# Altium PCB Pulp FMC Sensor Board_8X64Mbits_HyperRam.PcbDoc (part 1 of 3)
Units mm, origin at the board's own origin, x right, y up, seen from the top; angles counter-clockwise.
Board outline 72.9 x 68.96 mm, 4 copper layers (Top Layer, GND, PWR, Bottom Layer), stack 1.56 mm thick; 43 components, 37 nets, 422 pads, 283 vias.
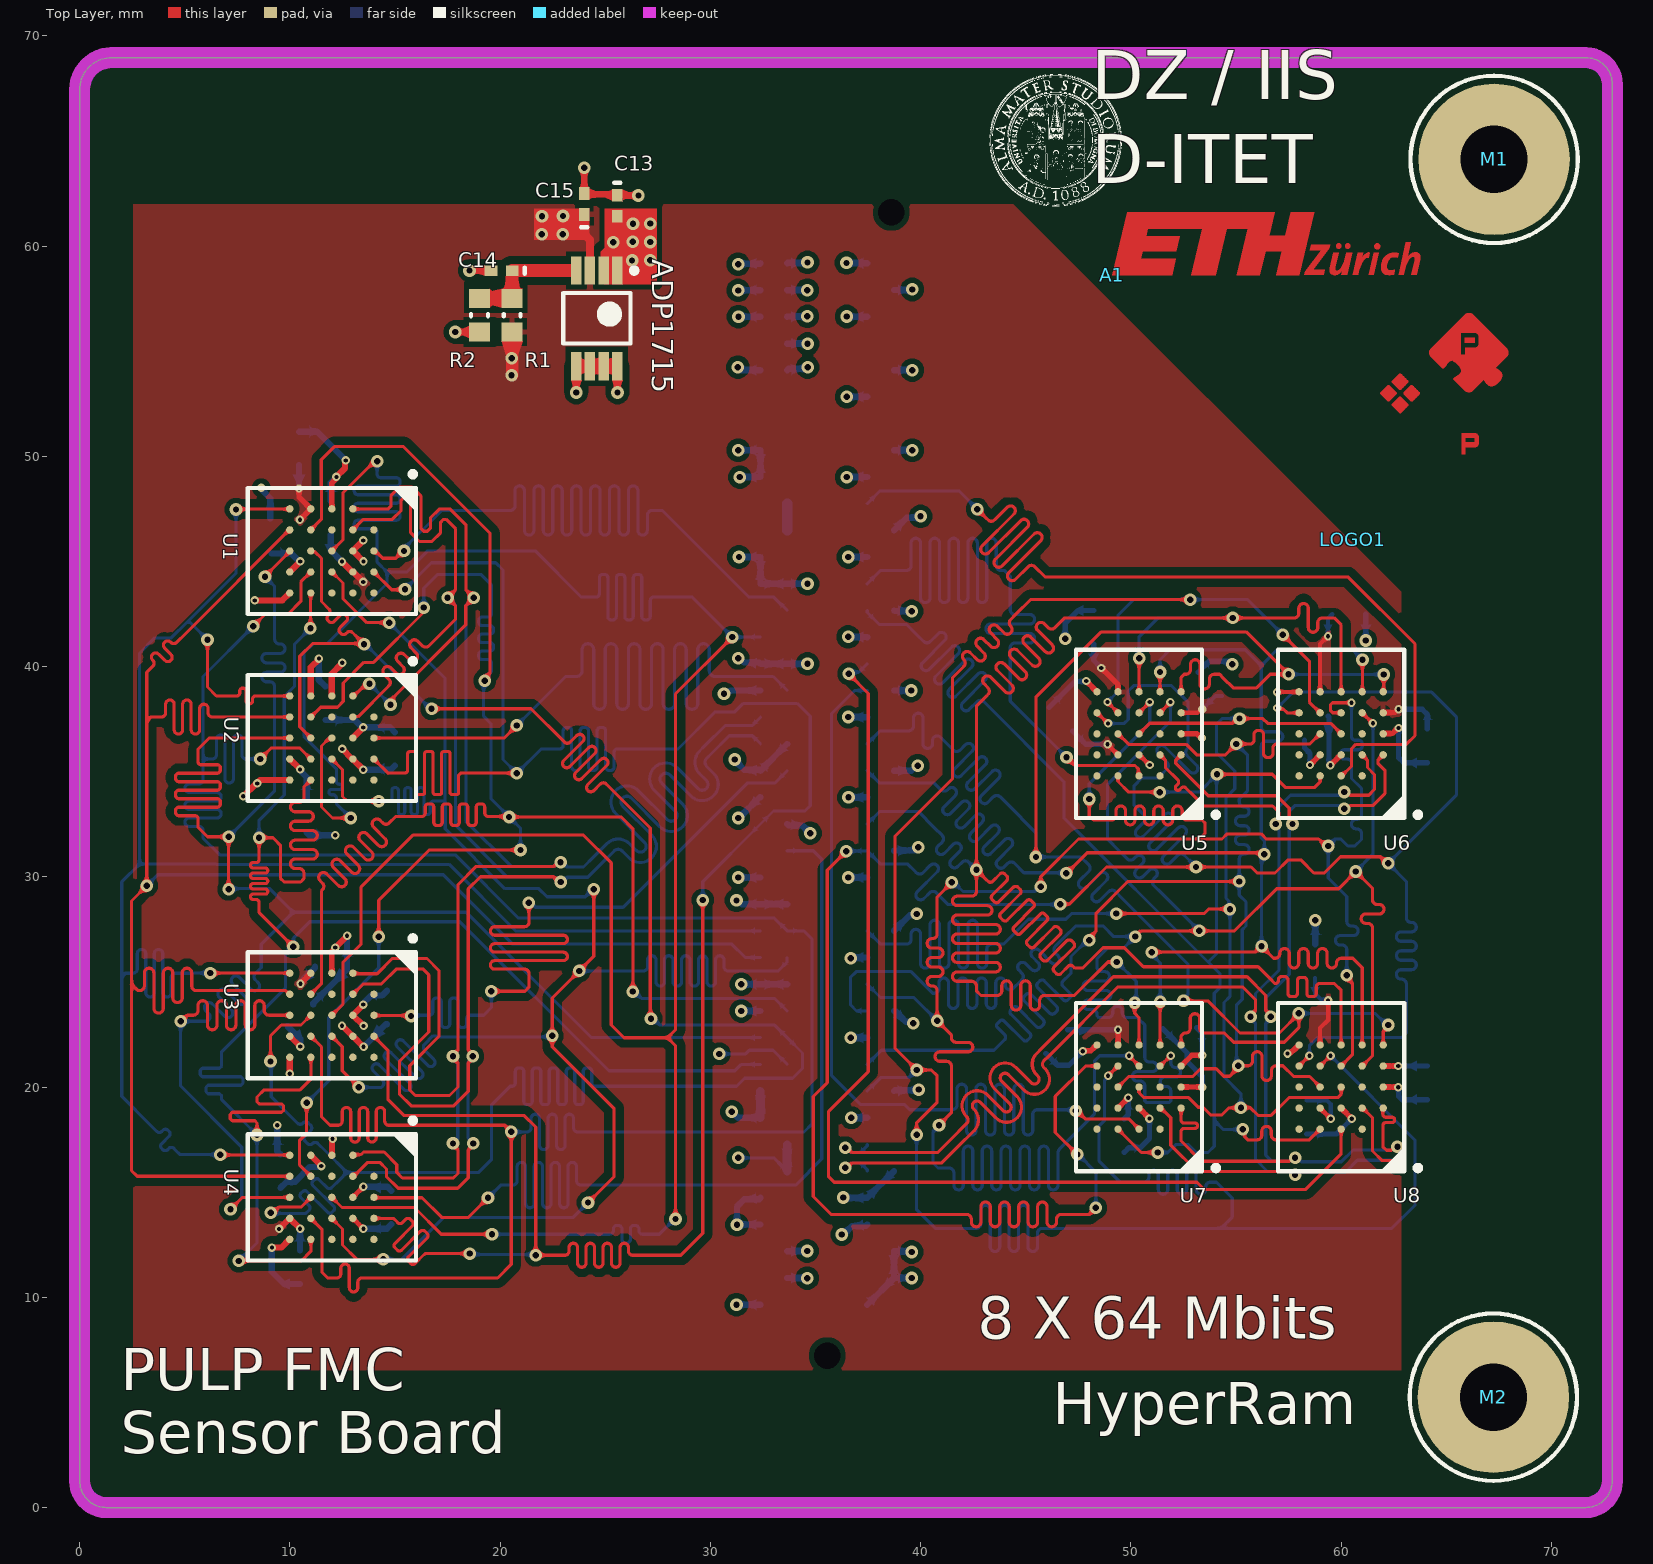
[diagram p0: Top Layer view]
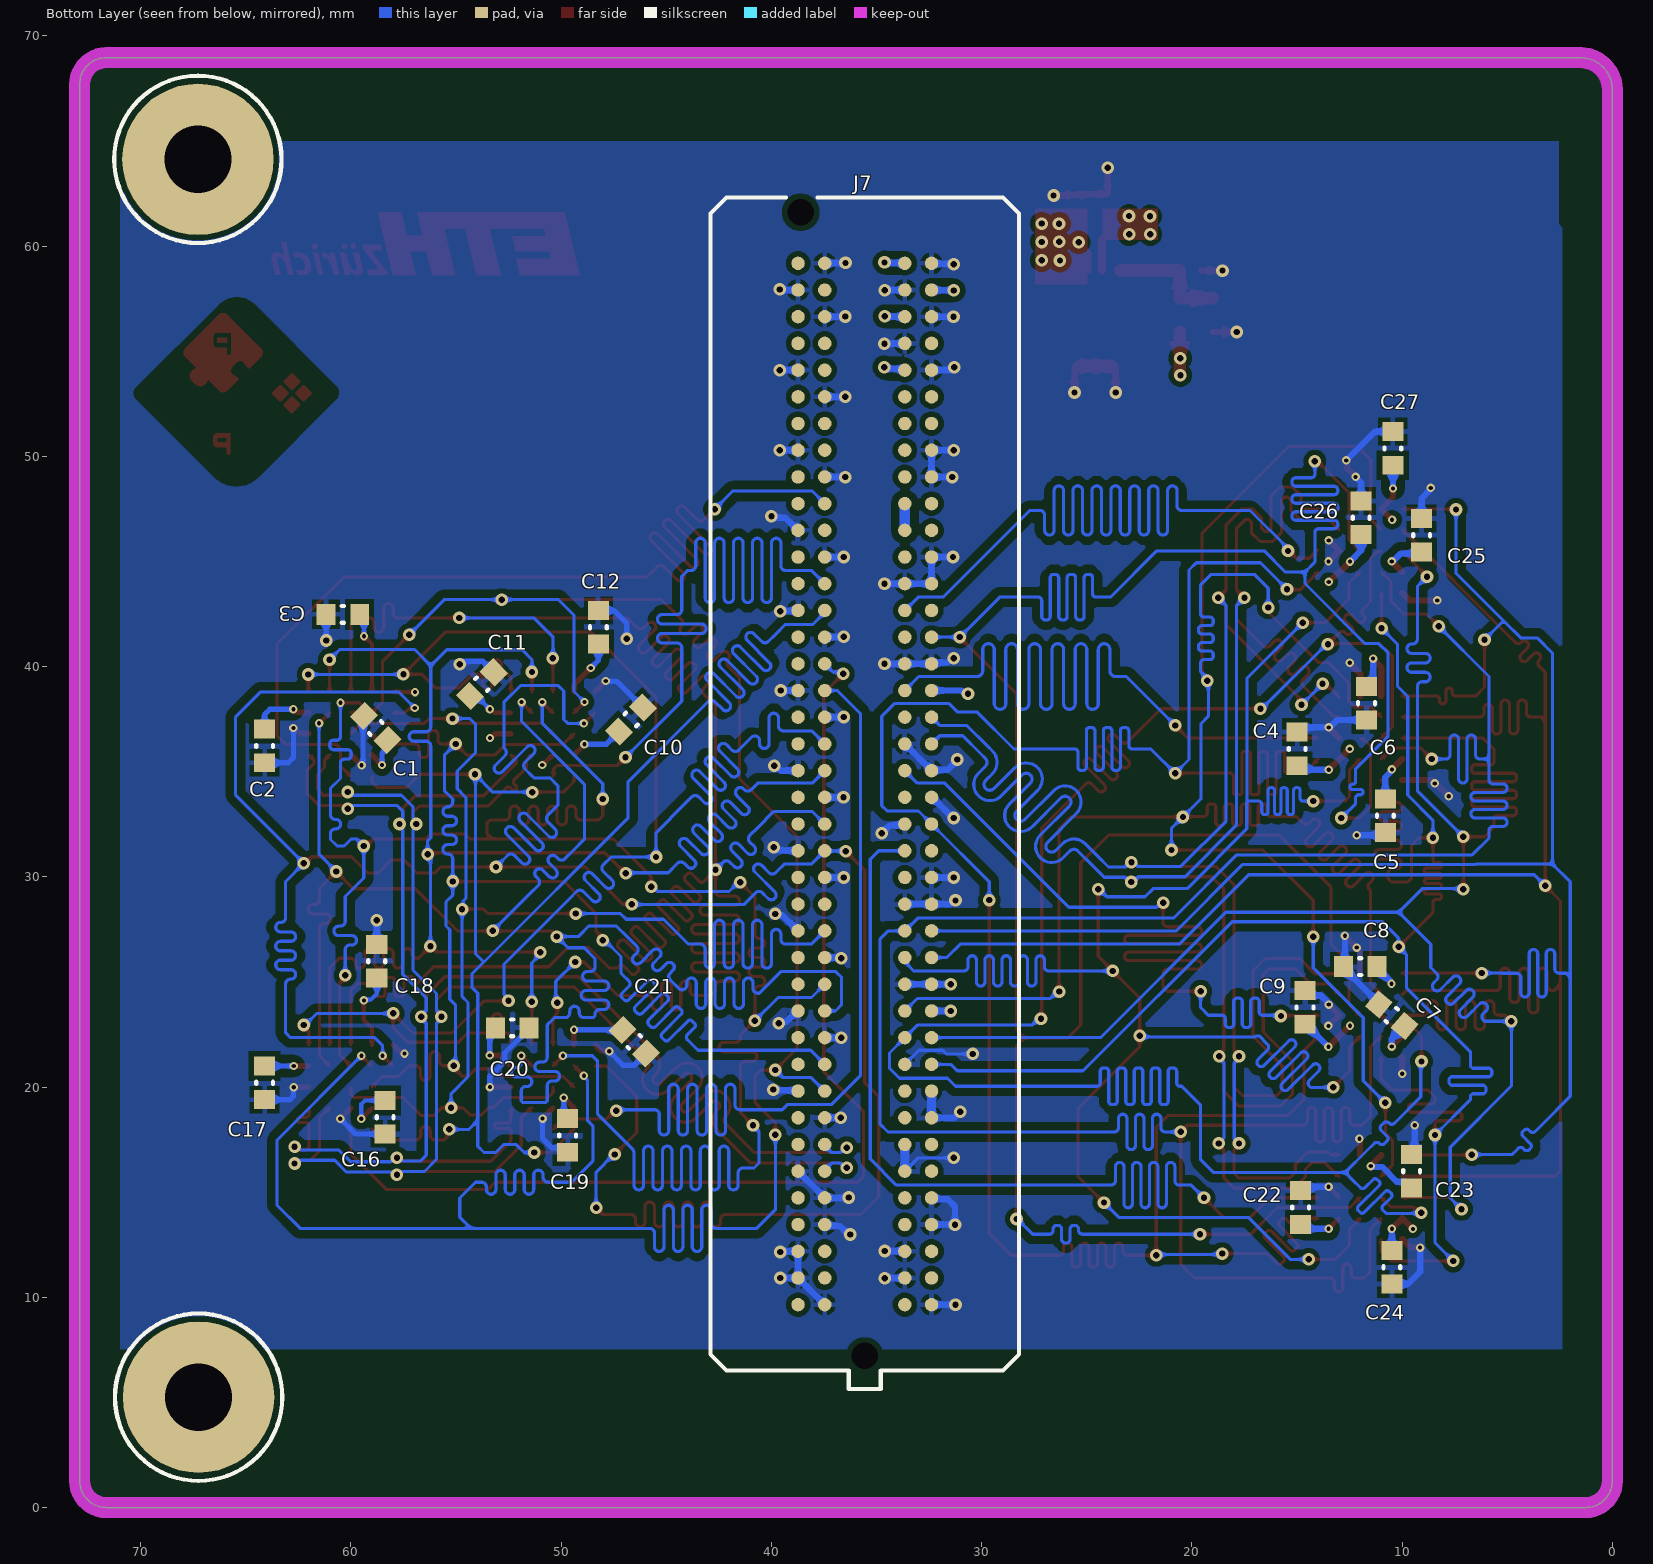
[diagram p1: Bottom Layer view, seen from below]
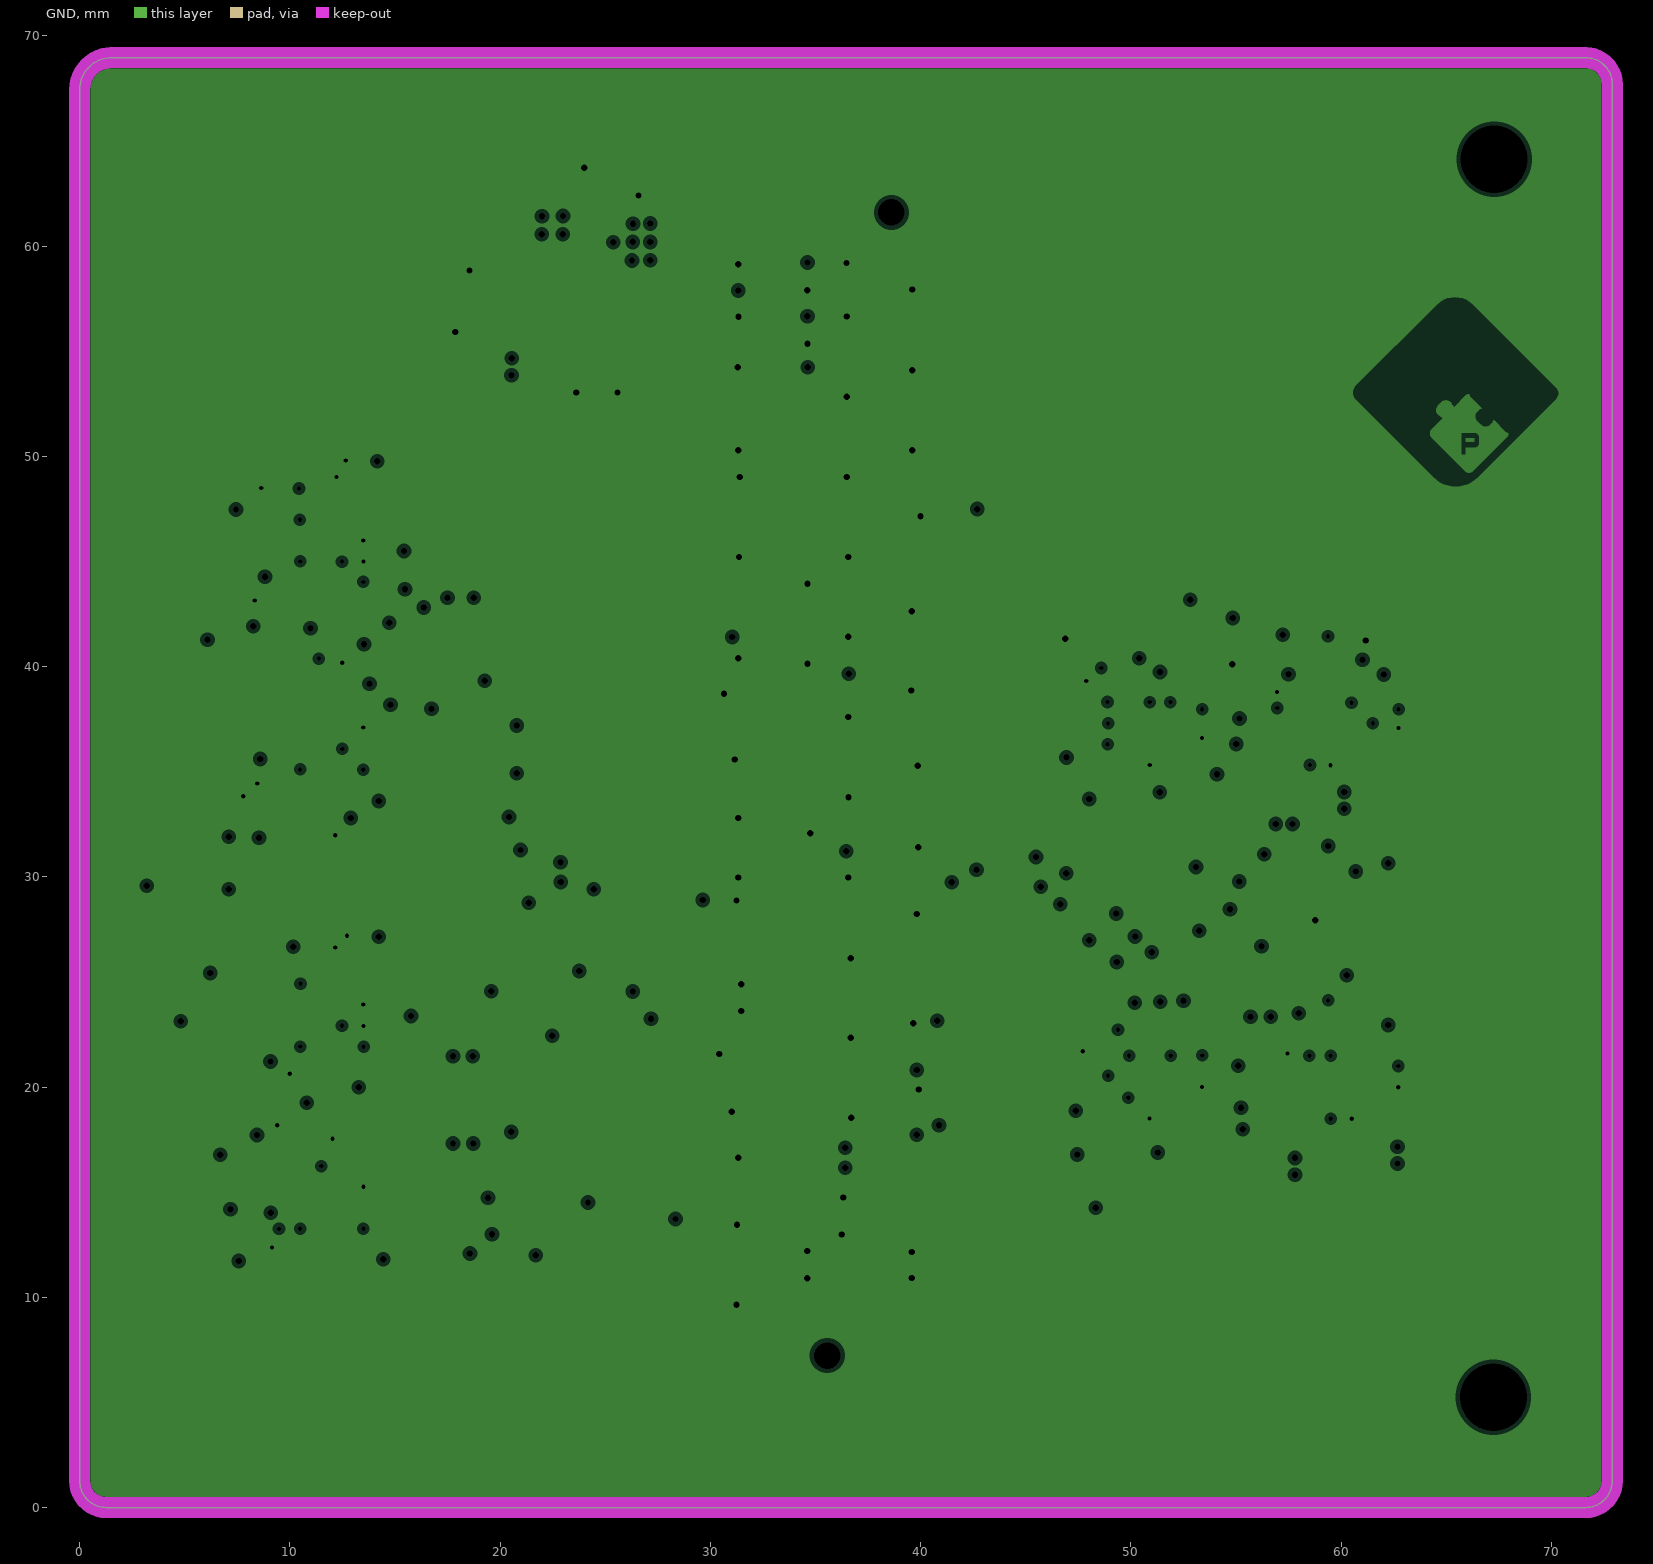
[diagram p2: GND, clearances drawn from the general rule]
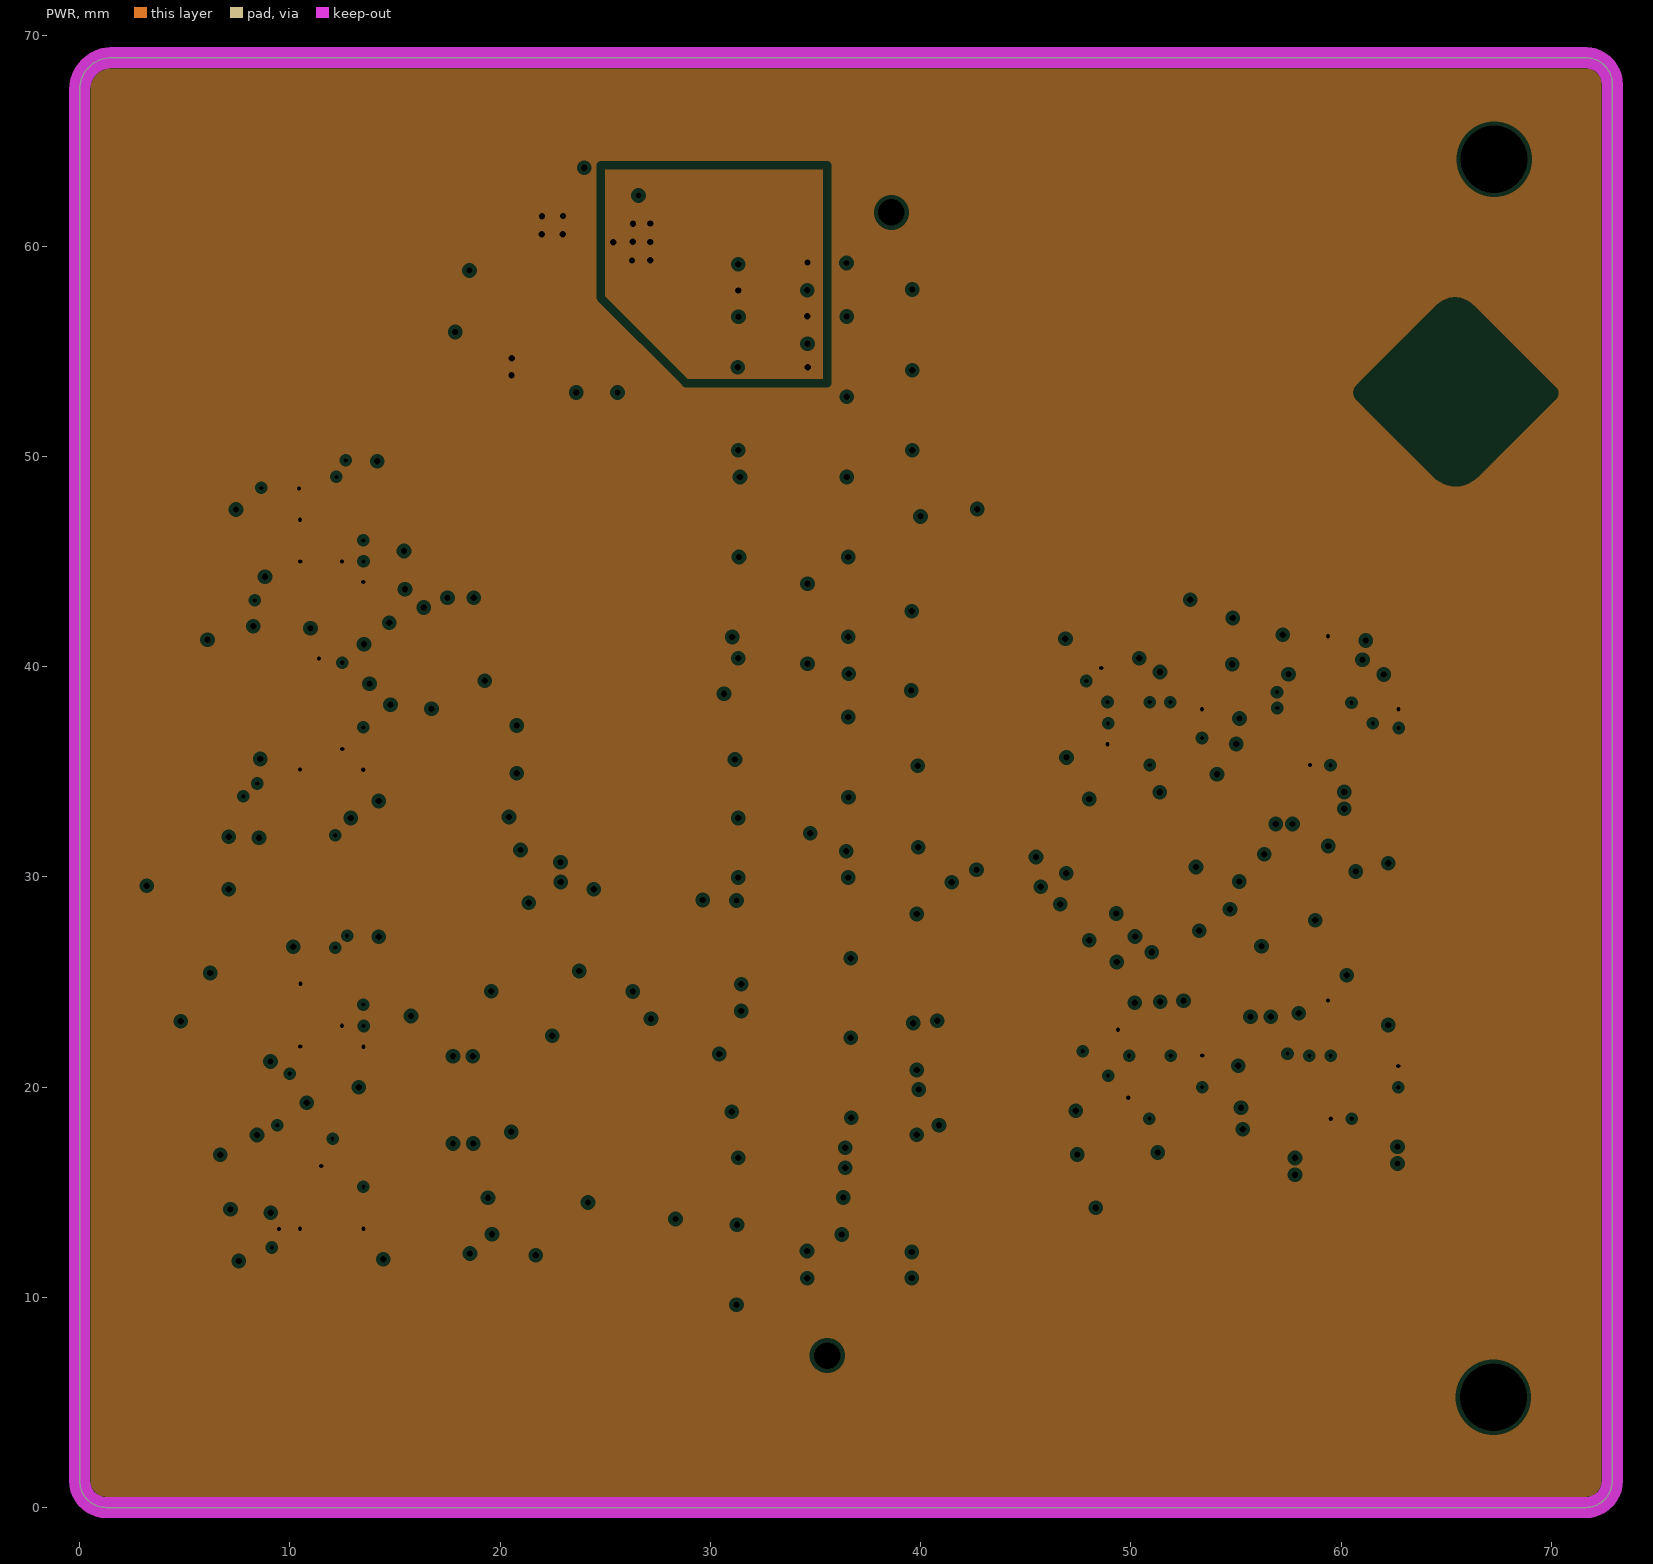
[diagram p3: PWR, clearances drawn from the general rule]
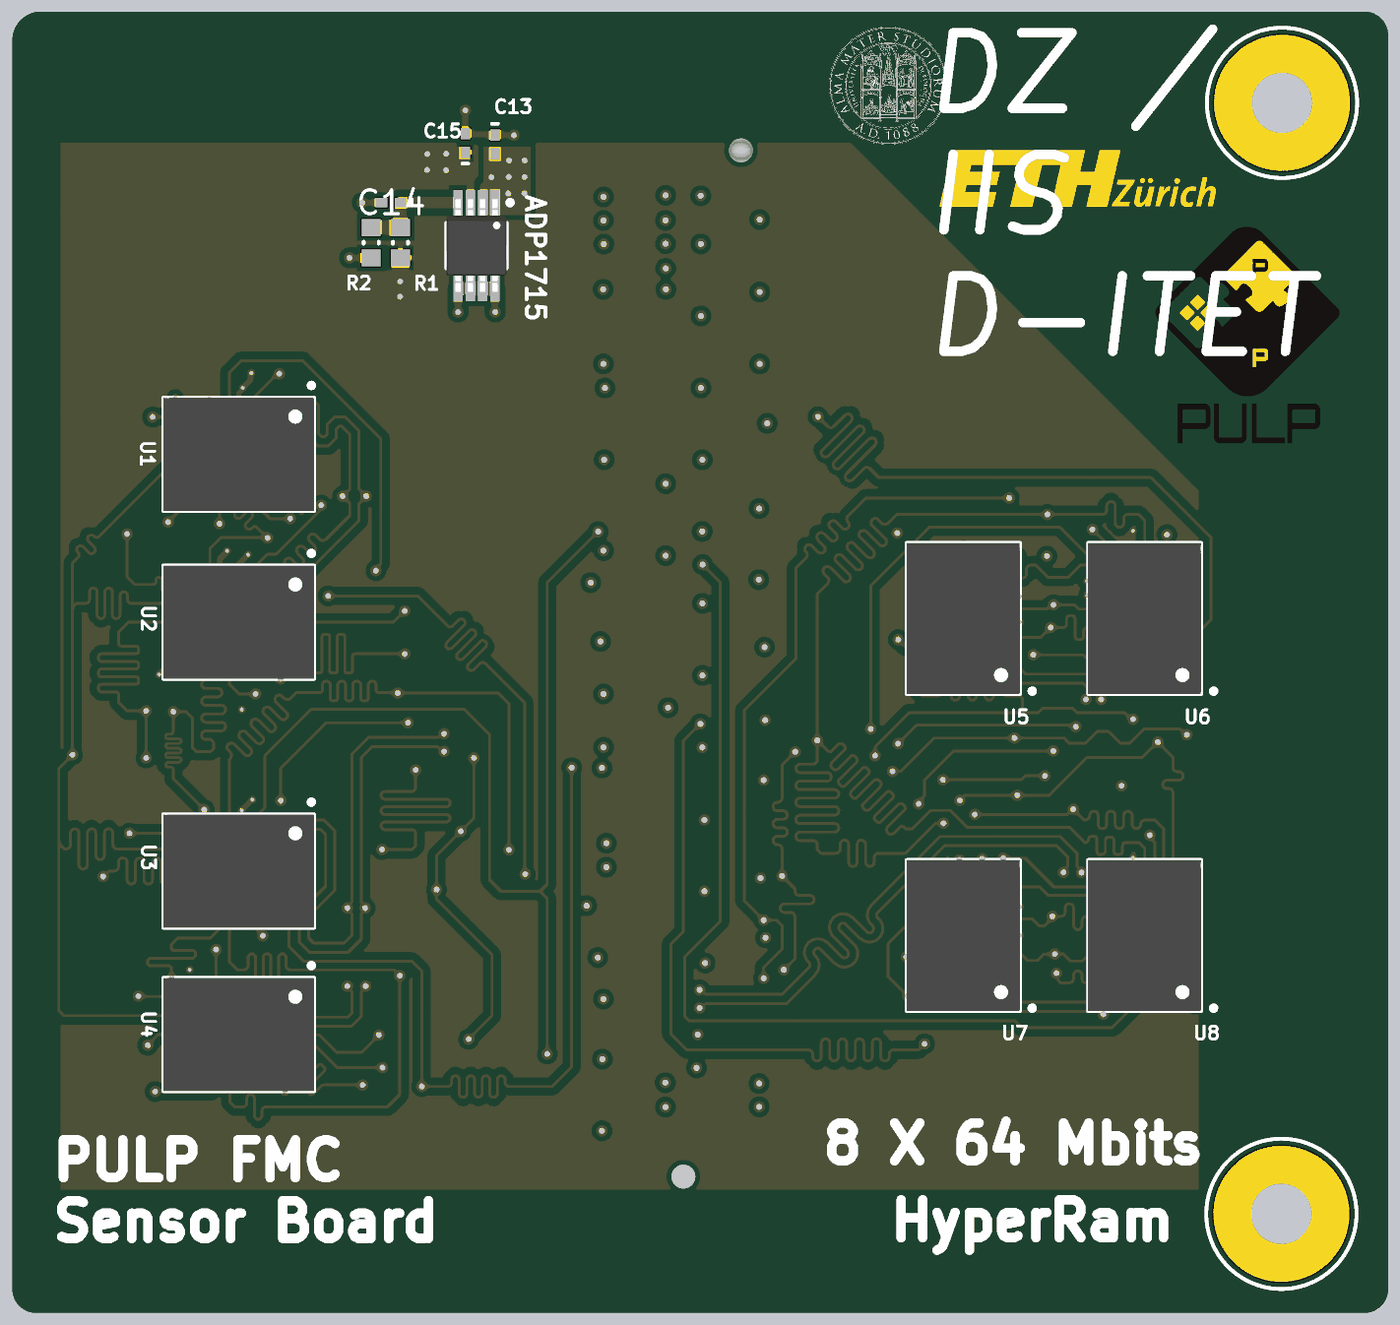
[diagram p6: 3D render of the assembled board from above, using the file's embedded part models]

## Layer stack, top to bottom
Top Solder: solder mask 0.0254, SM-001, Dk 4
Top Layer: signal copper 0.035
Dielectric 1: prepreg 0.11, PP-017, Dk 4.29
GND: plane copper 0.035, net GND
Dielectric 3: core 1.2, Core-039, Dk 4.8
PWR: plane copper 0.035, net (Multiple Nets)
Dielectric 5: prepreg 0.11, PP-017, Dk 4.29
Bottom Layer: signal copper 0.035
Bottom Solder: solder mask 0.0254, SM-001, Dk 4

## Board outline
1.27,0 cw(c1.27,1.27) 0,1.27 0,67.437 cw(c1.524,67.437) 1.524,68.961 71.628,68.961 cw(c71.628,67.691) 72.898,67.691 72.898,1.27 cw(c71.628,1.27) 71.628,0

## Design rules (kind name [scope] priority, off if disabled: settings)
BoardOutlineClearance [All] p1: gap=0 ignorepadtopadclearanceinfootprint=FALSE except(0.4: Poly-OutlineEdge)
Clearance [All] p1: gap=0.25 ignorepadtopadclearanceinfootprint=FALSE except(0.15: Arc-Text Track-Text SMDPad-SMDPad SMDPad-Text THPad-Text Via-Text Fill-Text Poly-Text Region-Text Text-Text; 0.2: Arc-SMDPad Arc-THPad Arc-Via Track-SMDPad Track-THPad Track-Via Via-Via Poly-Poly; 0.3: Arc-Arc Arc-Track Track-Track; 0.4: Track-Poly)
ComponentClearance [All] p1 off: gap=0.35 collisioncheckmode=3 verticalgap=0.254 showdistances=FALSE
DiffPairsRouting [All] p1: maxlimit=0.339 minlimit=0.339 mostfreqgap=0.339 toplayer_minwidth=0.15 toplayer_maxwidth=0.15 toplayer_prefwidth=0.15 bottomlayer_minwidth=0.15 bottomlayer_maxwidth=0.15 bottomlayer_prefwidth=0.15 maxuncoupledlength=10
FabricationTestPointUsage TestPointUsage [All] p1: valid=0 allowmultiple=FALSE
FabricationTestpoint Testpoint [(IsPad And (OnTopLayer Or OnBottomLayer))] p1: side=3 testpointundercomponent=TRUE minsize=1.016 maxsize=2.54 preferedsize=1.524 minholesize=0 maxholesize=1.016 preferedholesize=0.813 testpointgrid=0.025 allowsidetop=TRUE allowsidebottom=TRUE usegrid=TRUE gridtolerance=0
Height [All] p1 off: minheight=0 maxheight=25.4 prefheight=12.7
HoleSize [All] p1: absolutevalues=TRUE maxlimit=7 minlimit=0.2 maxpercent=80.000 minpercent=20.000
MinimumAnnularRing [All] p1 off: minimumring=0.15
MinimumSolderMaskSliver [All] p1: minsoldermaskwidth=0.099
PlaneClearance [All] p1: clearance=0.2
PlaneConnect [All] p1: pad.planeconnectstyle=Relief pad.reliefexpansion=0.25 pad.reliefentries=4 pad.reliefconductorwidth=0.2 pad.reliefairgap=0.2 via.planeconnectstyle=Direct via.reliefexpansion=0.25 via.reliefentries=4 via.reliefconductorwidth=0.2 via.reliefairgap=0.2
PolygonConnect [All] p1: thpad.connectstyle=Relief thpad.reliefconductorwidth=0.25 thpad.reliefentries=4 thpad.polygonreliefangle="90 Angle" thpad.airgapwidth=0.2 smdpad.connectstyle=Relief smdpad.reliefconductorwidth=0.25 smdpad.reliefentries=4 smdpad.polygonreliefangle="90 Angle" smdpad.airgapwidth=0.2 via.connectstyle=Direct via.reliefconductorwidth=0.25 via.reliefentries=4 via.polygonreliefangle="90 Angle" via.airgapwidth=0.2
RoutingVias [All] p1: holewidth=0.3 width=0.6 viastyle="Through Hole" minholewidth=0.2 minwidth=0.4 maxholewidth=0.8 maxwidth=1.2
SilkToSilkClearance [All] p1: silktosilkclearance=0.01
SilkToSolderMaskClearance [IsPad] p1: minsilkscreentomaskgap=0.01 clearancetoexposedcopper=TRUE
SolderMaskExpansion SolderMaskExpansion_1 [isvia] p1: expansion=0.102 istentingtop=TRUE soldermaskfromhole=TRUE
SolderMaskExpansion [All] p2: expansion=0.075 istentingtop=FALSE
SupplyNets "Schematic Supply Nets_2" [InNet('V3p3')] p1: voltage=0.000
SupplyNets "Schematic Supply Nets_1" [InNet('GND')] p2: voltage=0.000
SupplyNets "Schematic Supply Nets" [InNet('Vmem_low')] p3: voltage=0.000
UnRoutedNet [All] p1: checkbadconnections=TRUE
Width [All] p1: maxlimit=0.6 minlimit=0.15 preferedwidth=0.3
18 further rules are at their usual default settings.

## Classes and differential pairs
component class U_HyperRAM2: A1 C4 C5 C6 C7 C8 C9 C22 C23 C24 C25 C26 C27 LOGO1 M1 M2 U1 U2 U3 U4
pad class ExtendedClearance: O3216-A
pad class Vias: DPS8-A9
pad class Sense: DPS1-A6 DPS1-A12 DPS1-B5 DPS1-B7 DPS1-B11 DPS1-B13 DPS1-B17 DPS1-C2 DPS1-C6 DPS1-C12 DPS1-C16 DPS2-A6 DPS2-A12 DPS2-B3 DPS2-B5 DPS2-B11 DPS2-B13 DPS2-C2 DPS2-C6 DPS2-C12 DPS2-C16 DPS3-C12
pad class DirectConnect: 30501-1 30501-2 30501-3 30501-4 30501-5 30501-6 30501-7 30501-8 30501-9 30502-1 30502-2 30502-3 30502-4 30502-5 30502-6 30502-7 30502-8 30502-9 30503-1 30503-2 30503-3 30503-4 30503-5 30503-6 30503-7 30503-8 30503-9 30504-1 30504-2 30504-3 30504-4 30504-5 30504-6 30504-7 30504-8 30504-9
component class "U_FMC and Power": ADP1715 C13 C14 C15 J7 R1 R2
component class U_HyperRAM: C1 C2 C3 C10 C11 C12 C16 C17 C18 C19 C20 C21 U5 U6 U7 U8
net class FMC_HYPER_D[0..7]: FMC_HYPER_D0 FMC_HYPER_D1 FMC_HYPER_D2 FMC_HYPER_D3 FMC_HYPER_D4 FMC_HYPER_D5 FMC_HYPER_D6 FMC_HYPER_D7
net class Hyper: FMC_HYPER_CK_N FMC_HYPER_CK_P FMC_HYPER_CSN0 FMC_HYPER_CSN1 FMC_HYPER_CSN2 FMC_HYPER_CSN3 FMC_HYPER_D0 FMC_HYPER_D1 FMC_HYPER_D2 FMC_HYPER_D3 FMC_HYPER_D4 FMC_HYPER_D5 FMC_HYPER_D6 FMC_HYPER_D7 FMC_HYPER_RWDS
net class FMC_HYPER2_D[0..7]: FMC_HYPER2_D0 FMC_HYPER2_D1 FMC_HYPER2_D2 FMC_HYPER2_D3 FMC_HYPER2_D4 FMC_HYPER2_D5 FMC_HYPER2_D6 FMC_HYPER2_D7
net class Hyper2: FMC_HYPER2_CK_N FMC_HYPER2_CK_P FMC_HYPER2_CSN0 FMC_HYPER2_CSN1 FMC_HYPER2_CSN2 FMC_HYPER2_CSN3 FMC_HYPER2_D0 FMC_HYPER2_D1 FMC_HYPER2_D2 FMC_HYPER2_D3 FMC_HYPER2_D4 FMC_HYPER2_D5 FMC_HYPER2_D6 FMC_HYPER2_D7 FMC_HYPER2_RWDS
net class FMC_HYPER2_CSN[0..3]: FMC_HYPER2_CSN0 FMC_HYPER2_CSN1 FMC_HYPER2_CSN2 FMC_HYPER2_CSN3
net class FMC_HYPER_CSN[0..3]: FMC_HYPER_CSN0 FMC_HYPER_CSN1 FMC_HYPER_CSN2 FMC_HYPER_CSN3
differential pair FMC_HYPER2_CK: +FMC_HYPER2_CK_P -FMC_HYPER2_CK_N
differential pair FMC_HYPER_CK: +FMC_HYPER_CK_P -FMC_HYPER_CK_N

## Components (designator, comment, footprint, x,y, rotation, side; value= is the part's Value field where it differs from the comment)
A1 "Logo ETH Zurich" eth-zurich_3mm 49.119,58.612 r0 top
ADP1715 "ADP1715" TSOP65P490X110-8N 24.597,56.563 r270 top
C1 "CAP 100nF 25V 0603(1608)" CAPC0603(1608)100_N 58.817,37.077 r225 bottom value=100nF
C2 "CAP 100nF 25V 0603(1608)" CAPC0603(1608)100_N 64.1,36.225 r90 bottom value=100nF
C3 "CAP 100nF 25V 0603(1608)" CAPC0603(1608)100_N 60.378,42.487 r180 bottom value=100nF
C4 "CAP 100nF 25V 0603(1608)" CAPC0603(1608)100_N 14.989,36.082 r270 bottom value=100nF
C5 "CAP 100nF 25V 0603(1608)" CAPC0603(1608)100_N 10.794,32.905 r90 bottom value=100nF
C6 "CAP 100nF 25V 0603(1608)" CAPC0603(1608)100_N 11.69,38.26 r90 bottom value=100nF
C7 "CAP 100nF 25V 0603(1608)" CAPC0603(1608)100_N 10.494,23.417 r220 bottom value=100nF
C8 "CAP 100nF 25V 0603(1608)" CAPC0603(1608)100_N 11.995,25.725 r180 bottom value=100nF
C9 "CAP 100nF 25V 0603(1608)" CAPC0603(1608)100_N 14.617,23.787 r270 bottom value=100nF
C10 "CAP 100nF 25V 0603(1608)" CAPC0603(1608)100_N 46.672,37.484 r315 bottom value=100nF
C11 "CAP 100nF 25V 0603(1608)" CAPC0603(1608)100_N 53.768,39.163 r315 bottom value=100nF
C12 "CAP 100nF 25V 0603(1608)" CAPC0603(1608)100_N 48.231,41.865 r270 bottom value=100nF
C13 "Cap Semi" 0402-A 25.572,61.916 r270 top value=2.2uF
C14 "Cap Semi" 0402-A 20.066,58.838 r180 top value=10nF
C15 "Cap Semi" 0402-A 24,62 r90 top value=2.2uF
C16 "CAP 100nF 25V 0603(1608)" CAPC0603(1608)100_N 58.367,18.565 r90 bottom value=100nF
C17 "CAP 100nF 25V 0603(1608)" CAPC0603(1608)100_N 64.1,20.2 r90 bottom value=100nF
C18 "CAP 100nF 25V 0603(1608)" CAPC0603(1608)100_N 58.767,25.986 r270 bottom value=100nF
C19 "CAP 100nF 25V 0603(1608)" CAPC0603(1608)100_N 49.688,17.698 r90 bottom value=100nF
C20 "CAP 100nF 25V 0603(1608)" CAPC0603(1608)100_N 52.327,22.82 r0 bottom value=100nF
C21 "CAP 100nF 25V 0603(1608)" CAPC0603(1608)100_N 46.52,22.156 r45 bottom value=100nF
C22 "CAP 100nF 25V 0603(1608)" CAPC0603(1608)100_N 14.825,14.271 r270 bottom value=100nF
C23 "CAP 100nF 25V 0603(1608)" CAPC0603(1608)100_N 9.548,16 r270 bottom value=100nF
C24 "CAP 100nF 25V 0603(1608)" CAPC0603(1608)100_N 10.483,11.43 r90 bottom value=100nF
C25 "CAP 100nF 25V 0603(1608)" CAPC0603(1608)100_N 9.071,46.247 r270 bottom value=100nF
C26 "CAP 100nF 25V 0603(1608)" CAPC0603(1608)100_N 11.945,47.072 r270 bottom value=100nF
C27 "CAP 100nF 25V 0603(1608)" CAPC0603(1608)100_N 10.443,50.375 r270 bottom value=100nF
J7 "ASP-134604-01" ASP-134604-01 35.555,34.415 r270 bottom
LOGO1 "Logo Pulp" "Logo Pulp" 60.562,46.039 r0 top
M1 "Mounting Hole" "Hole M3" 67.275,64.125 r0 top
M2 "Mounting Hole" "Hole M3" 67.241,5.25 r0 top
R1 "15K 5% 0603(1608)" RESC0603(1608)_N 20.566,56.713 r270 top value="15K DNP"
R2 "12K 5% 0603(1608)" RESC0603(1608)_N 19.016,56.713 r90 top value="12K DNP"
U1 "S71KS512SC0" FBGA24_A-130#1 11.995,45.5 r270 top (schematic designator U8)
U2 "S71KS512SC0" FBGA24_A-130#2 11.995,36.602 r270 top (schematic designator U1)
U3 "S71KS512SC0" FBGA24_A-130#1 11.995,23.417 r270 top (schematic designator U2)
U4 "S71KS512SC0" FBGA24_A-130#1 11.995,14.755 r270 top (schematic designator U7)
U5 "S71KS512SC0" FBGA24_A-130#1 50.387,36.8 r180 top (schematic designator U6)
U6 "S71KS512SC0" FBGA24_A-130#3 60,36.8 r180 top (schematic designator U5)
U7 "S71KS512SC0" FBGA24_A-130#1 50.387,20 r180 top (schematic designator U4)
U8 "S71KS512SC0" FBGA24_A-130#1 60,20 r180 top (schematic designator U3)

## Footprints (in the part's own frame and the unit in brackets; to place one, negate y for a bottom-side part, rotate by r counter-clockwise, add the part's x,y. Pads: shape width x height; smd on the part's side, far side on the other; paste and mask are expansions set on the pad)
0402-A [mm] "Chip Inductor, Body 1.0x0.5mm, IPC High Density"
  rect 0.6x0.5 smd: 1(-0.5,0) 2(0.5,0)
  silkscreen extent -1.1,-0.15 -1.1,0.15, body extent -0.55,-0.3 0.55,0.3, height 0.55
ASP-134604-01 [mm] "FMC 160 Position Connector Array, Male Pins Surface Mount Gold"
  round 0.64 smd: C1(24.765,3.175) C2(23.495,3.175) C3(22.225,3.175) C4(20.955,3.175) C5(19.685,3.175) C6(18.415,3.175) C7(17.145,3.175) C8(15.875,3.175) C9(14.605,3.175) C10(13.335,3.175) C11(12.065,3.175) C12(10.795,3.175) C13(9.525,3.175) C14(8.255,3.175) C15(6.985,3.175) C16(5.715,3.175) C17(4.445,3.175) C18(3.175,3.175) C19(1.905,3.175) C20(0.635,3.175) C21(-0.635,3.175) C22(-1.905,3.175) C23(-3.175,3.175) C24(-4.445,3.175) C25(-5.715,3.175) C26(-6.985,3.175) C27(-8.255,3.175) C28(-9.525,3.175) C29(-10.795,3.175) C30(-12.065,3.175) C31(-13.335,3.175) C32(-14.605,3.175) C33(-15.875,3.175) C34(-17.145,3.175) C35(-18.415,3.175) C36(-19.685,3.175) C37(-20.955,3.175) C38(-22.225,3.175) C39(-23.495,3.175) C40(-24.765,3.175) D1(24.765,1.905) D2(23.495,1.905) D3(22.225,1.905) D4(20.955,1.905) D5(19.685,1.905) D6(18.415,1.905) D7(17.145,1.905) D8(15.875,1.905) D9(14.605,1.905) D10(13.335,1.905) D11(12.065,1.905) D12(10.795,1.905) D13(9.525,1.905) D14(8.255,1.905) D15(6.985,1.905) D16(5.715,1.905) D17(4.445,1.905) D18(3.175,1.905) D19(1.905,1.905) D20(0.635,1.905) D21(-0.635,1.905) D22(-1.905,1.905) D23(-3.175,1.905) D24(-4.445,1.905) D25(-5.715,1.905) D26(-6.985,1.905) D27(-8.255,1.905) D28(-9.525,1.905) D29(-10.795,1.905) D30(-12.065,1.905) D31(-13.335,1.905) D32(-14.605,1.905) D33(-15.875,1.905) D34(-17.145,1.905) D35(-18.415,1.905) D36(-19.685,1.905) D37(-20.955,1.905) D38(-22.225,1.905) D39(-23.495,1.905) D40(-24.765,1.905) G1(24.765,-1.905) G2(23.495,-1.905) G3(22.225,-1.905) G4(20.955,-1.905) G5(19.685,-1.905) G6(18.415,-1.905) G7(17.145,-1.905) G8(15.875,-1.905) G9(14.605,-1.905) G10(13.335,-1.905) G11(12.065,-1.905) G12(10.795,-1.905) G13(9.525,-1.905) G14(8.255,-1.905) G15(6.985,-1.905) G16(5.715,-1.905) G17(4.445,-1.905) G18(3.175,-1.905) G19(1.905,-1.905) G20(0.635,-1.905) G21(-0.635,-1.905) G22(-1.905,-1.905) G23(-3.175,-1.905) G24(-4.445,-1.905) G25(-5.715,-1.905) G26(-6.985,-1.905) G27(-8.255,-1.905) G28(-9.525,-1.905) G29(-10.795,-1.905) G30(-12.065,-1.905) G31(-13.335,-1.905) G32(-14.605,-1.905) G33(-15.875,-1.905) G34(-17.145,-1.905) G35(-18.415,-1.905) G36(-19.685,-1.905) G37(-20.955,-1.905) G38(-22.225,-1.905) G39(-23.495,-1.905) G40(-24.765,-1.905) H1(24.765,-3.175) H2(23.495,-3.175) H3(22.225,-3.175) H4(20.955,-3.175) H5(19.685,-3.175) H6(18.415,-3.175) H7(17.145,-3.175) H8(15.875,-3.175) H9(14.605,-3.175) H10(13.335,-3.175) H11(12.065,-3.175) H12(10.795,-3.175) H13(9.525,-3.175) H14(8.255,-3.175) H15(6.985,-3.175) H16(5.715,-3.175) H17(4.445,-3.175) H18(3.175,-3.175) H19(1.905,-3.175) H20(0.635,-3.175) H21(-0.635,-3.175) H22(-1.905,-3.175) H23(-3.175,-3.175) H24(-4.445,-3.175) H25(-5.715,-3.175) H26(-6.985,-3.175) H27(-8.255,-3.175) H28(-9.525,-3.175) H29(-10.795,-3.175) H30(-12.065,-3.175) H31(-13.335,-3.175) H32(-14.605,-3.175) H33(-15.875,-3.175) H34(-17.145,-3.175) H35(-18.415,-3.175) H36(-19.685,-3.175) H37(-20.955,-3.175) H38(-22.225,-3.175) H39(-23.495,-3.175) H40(-24.765,-3.175)
  round 0.97 hole 1.27 unplated: MH1(-27.19,-3.05) MH2(27.19,0)
  silkscreen extent -27.89,-7.34 28.78,7.34, body extent -27.89,-7.34 28.78,7.34, height 7.12
CAPC0603(1608)100_N [mm] "Chip Capacitor, Body 1.6x0.8mm, Height 1.0mm, IPC Medium Density"
  rect 0.9x1 smd: 1(-0.8,0) 2(0.8,0)
  silkscreen extent -0.05,-0.4 0.05,0.4, body extent -0.88,-0.47 0.88,0.47, height 1
eth-zurich_3mm [mm] "Logo ETH Zurich"
  Top Layer circle w0.3: c12.598,1.372 r0.001
  Top Layer circle w0.27: c11.193,1.389 r0.001
  Top Layer circle w0.27: c10.764,1.389 r0.001
  Top Layer region: 14.118,0.96 14.049,0.879 14.2,1.562 13.955,1.562 13.614,0.024 13.86,0.024 13.95,0.433 14.001,0.555 14.061,0.663 14.121,0.759 14.181,0.822 14.229,0.855 14.277,0.879 14.313,0.879 14.349,0.867 14.373,0.843 14.379,0.807 14.379,0.759 14.373,0.717 14.219,0.024 14.486,0.024 14.601,0.555 14.644,0.753 14.649,0.843 14.637,0.927 14.613,0.999 14.565,1.047 14.505,1.083 14.457,1.095 14.361,1.095 14.265,1.071 14.181,1.023
  Top Layer region: 13.614,1.051 13.56,1.071 13.5,1.08 13.404,1.08 13.296,1.071 13.182,1.044 13.086,0.996 13.008,0.936 12.96,0.888 12.912,0.828 12.87,0.756 12.84,0.684 12.81,0.6 12.792,0.522 12.78,0.444 12.78,0.342 12.792,0.252 12.81,0.192 12.84,0.132 12.876,0.084 12.924,0.048 12.978,0.024 13.032,0.012 13.152,0 13.212,0 13.32,0.012 13.387,0.028 13.416,0.036 13.441,0.272 13.386,0.252 13.308,0.234 13.248,0.228 13.206,0.228 13.158,0.24 13.116,0.264 13.092,0.288 13.074,0.324 13.062,0.366 13.056,0.408 13.056,0.462 13.068,0.54 13.092,0.618 13.122,0.684 13.158,0.738 13.212,0.804 13.26,0.834 13.308,0.852 13.356,0.858 13.428,0.858 13.494,0.852 13.524,0.846 13.566,0.834
  Top Layer region: 12.438,0.024 12.671,1.071 12.424,1.071 12.192,0.024
  Top Layer region: 11.857,0.78 11.922,1.071 11.676,1.071 11.444,0.024 11.689,0.024 11.727,0.193 11.784,0.378 11.85,0.54 11.904,0.642 11.979,0.741 12.03,0.792 12.072,0.822 12.114,0.84 12.144,0.84 12.184,0.83 12.24,1.08 12.204,1.086 12.168,1.086 12.132,1.08 12.078,1.056 12.042,1.032 11.994,0.99 11.952,0.948 11.904,0.876
  Top Layer region: 11.166,0.024 11.398,1.071 11.121,1.071 11.031,0.661 10.98,0.54 10.92,0.432 10.86,0.336 10.8,0.273 10.752,0.24 10.704,0.216 10.668,0.216 10.632,0.228 10.608,0.252 10.602,0.288 10.602,0.336 10.608,0.378 10.763,1.071 10.496,1.071 10.38,0.54 10.336,0.342 10.332,0.252 10.344,0.168 10.368,0.096 10.416,0.048 10.476,0.012 10.524,0 10.62,0 10.716,0.024 10.8,0.072 10.863,0.135 10.932,0.216 10.89,0.024
  Top Layer region: 10.359,1.44 9.452,1.44 9.396,1.191 9.945,1.191 9.172,0.185 9.138,0.024 10.044,0.024 10.099,0.273 9.549,0.273 10.325,1.284
  Top Layer region: 8.895,0 9.6,3 8.493,3 8.227,1.87 7.459,1.87 7.723,3 0.705,3 0,0 2.838,0 3.021,0.78 1.356,0.78 1.442,1.146 3.034,1.146 3.204,1.866 1.609,1.866 1.693,2.22 4.273,2.22 3.75,0 4.923,0 5.445,2.22 6.433,2.22 5.913,0 7.02,0 7.29,1.151 8.058,1.151 7.788,0
FBGA24_A-130#1 [mm] "BGA, 24-Balls, Body 8x6mm, Pitch 1mm, A1 missing"
  round 0.35 smd paste-0.35: A2(-1,2) A3(0,2) A4(1,2) A5(2,2) B1(-2,1) B2(-1,1) B3(0,1) B4(1,1) B5(2,1) C1(-2,0) C2(-1,0) C3(0,0) C4(1,0) C5(2,0) D1(-2,-1) D2(-1,-1) D3(0,-1) D4(1,-1) D5(2,-1) E1(-2,-2) E2(-1,-2) E3(0,-2) E4(1,-2) E5(2,-2)
  silkscreen extent -3.77,-4 3,4, body extent -3,-4 3,4, height 1.3
FBGA24_A-130#2 [mm] "BGA, 24-Balls, Body 8x6mm, Pitch 1mm, A1 missing"
  round 0.35 smd paste-0.35: A2(-1,2) A3(0,2) A4(1,2) A5(2,2) B1(-2,1) B2(-1,1) B3(0,1) B4(1,1) B5(2,1) C1(-2,0) C2(-1,0) C3(0,0) C4(1,0) C5(2,0) D1(-2,-1) D2(-1,-1) D3(0,-1) D4(1,-1) D5(2,-1) E1(-2,-2) E2(-1,-2) E3(0,-2) E5(2,-2) z(1,-2)
  silkscreen extent -3.77,-4 3,4, body extent -3,-4 3,4, height 1.3
FBGA24_A-130#3 [mm] "BGA, 24-Balls, Body 8x6mm, Pitch 1mm, A1 missing"
  round 0.35 smd paste-0.35: A2(-1,2) A3(0,2) A4(1,2) A5(2,2) B2(-1,1) B3(0,1) B4(1,1) B5(2,1) C1(-2,0) C2(-1,0) C3(0,0) C4(1,0) C5(2,0) D1(-2,-1) D2(-1,-1) D3(0,-1) D4(1,-1) D5(2,-1) E1(-2,-2) E2(-1,-2) E3(0,-2) E4(1,-2) E5(2,-2) ZZ(-2,1)
  silkscreen extent -3.78,-4 3,4, body extent -3,-4 3,4, height 1.3
"Hole M3" [mm] "Plated Thru-Hole, 3.2mm hole, 7.2mm pad"
  round 7.2 hole 3.2: 1(0,0)
  silkscreen extent -3.98,-3.98 3.98,3.98
"Logo Pulp" [mm]
  Top Layer region: 5.163,5.057 5.163,4.066 5.341,4.066 5.341,4.854 5.798,4.854 5.798,4.625 5.341,4.625 5.341,4.396 5.824,4.396 5.902,4.428 5.956,4.492 5.976,4.574 5.976,4.574 5.976,4.879 5.96,4.955 5.915,5.017 5.849,5.057 5.849,5.057
  Top Layer pour cut-out: 0.148,7.319 0.044,7.171 0.004,6.994 0.035,6.815 0.132,6.662 0.132,6.662 3.83,2.964 4.312,2.641 4.881,2.528 5.45,2.641 5.932,2.963 5.932,2.963 9.66,6.699 9.755,6.864 9.755,7.055 9.66,7.22 9.66,7.22 5.754,11.118 5.346,11.419 4.851,11.525 4.355,11.419 3.947,11.118 3.947,11.118
  Top Layer region: 477 vertices and 0 holes, not listed, extent 1.851,6.019 2.632,6.794
  Top Layer region: 477 vertices and 0 holes, not listed, extent 1.299,6.572 2.08,7.347
  Top Layer region: 477 vertices and 0 holes, not listed, extent 2.404,6.572 3.185,7.347
  Top Layer region: 477 vertices and 0 holes, not listed, extent 1.851,7.124 2.632,7.899
  Top Layer region: 2639 vertices and 1 holes, not listed, extent 3.633,7.01 7.392,10.776
  Top Layer region: 5.792,9.588 5.792,9.582 5.792,9.575 5.792,9.569 5.792,9.563 5.792,9.556 5.792,9.55 5.792,9.544 5.792,9.537 5.792,9.531 5.792,9.525 5.792,9.518 5.792,9.512 5.792,9.506 5.792,9.499 5.792,9.493 5.792,9.487 5.792,9.48 5.792,9.474 5.792,9.468 5.792,9.461 5.792,9.455 5.792,9.448 5.792,9.442 5.792,9.436 5.792,9.429 5.792,9.423 5.792,9.417 5.792,9.41 5.792,9.404 5.792,9.398 5.792,9.391 5.792,9.385 5.792,9.379 5.792,9.372 5.792,9.366 5.786,9.366 5.786,9.36 5.335,9.36 5.335,9.366 5.328,9.366 5.328,9.372 5.328,9.379 5.328,9.385 5.328,9.391 5.328,9.398 5.328,9.404 5.328,9.41 5.328,9.417 5.328,9.423 5.328,9.429 5.328,9.436 5.328,9.442 5.328,9.448 5.328,9.455 5.328,9.461 5.328,9.468 5.328,9.474 5.328,9.48 5.328,9.487 5.328,9.493 5.328,9.499 5.328,9.506 5.328,9.512 5.328,9.518 5.328,9.525 5.328,9.531 5.328,9.537 5.328,9.544 5.328,9.55 5.328,9.556 5.328,9.563 5.328,9.569 5.328,9.575 5.328,9.582 5.328,9.588 5.328,9.595 5.792,9.595
  Bottom Layer pour cut-out: 0.148,7.322 0.044,7.174 0.004,6.997 0.035,6.818 0.132,6.665 0.132,6.665 3.83,2.967 4.312,2.644 4.881,2.531 5.45,2.644 5.932,2.966 5.932,2.966 9.66,6.702 9.755,6.867 9.755,7.058 9.66,7.223 9.66,7.223 5.754,11.121 5.346,11.422 4.851,11.528 4.355,11.422 3.947,11.121 3.947,11.121
  GND region: 5.163,5.057 5.163,4.066 5.341,4.066 5.341,4.854 5.798,4.854 5.798,4.625 5.341,4.625 5.341,4.396 5.824,4.396 5.902,4.428 5.956,4.492 5.976,4.574 5.976,4.574 5.976,4.879 5.96,4.955 5.915,5.017 5.849,5.057 5.849,5.057
  GND region: 5.932,2.966 5.45,2.644 4.881,2.531 4.881,2.531 4.313,2.644 3.831,2.965 3.831,2.965 0.132,6.665 0.037,6.807 0.004,6.974 0.004,6.974 0.004,6.997 0.037,7.164 0.132,7.306 0.132,7.306 4.002,11.176 4.392,11.437 4.851,11.528 4.851,11.528 5.31,11.437 5.699,11.176 5.699,11.176 9.653,7.223 9.737,7.104 9.768,6.962 9.768,6.962 9.739,6.821 9.66,6.702 9.66,6.702 6.833,3.861 6.807,3.835 6.567,4.075 6.545,4.075 7.383,4.912 7.398,4.937 7.401,4.965 7.401,4.965 7.401,5.086 7.319,5.103 7.249,5.149 7.249,5.149 6.709,5.689 6.702,5.689 6.632,5.619 6.62,5.602 6.616,5.582 6.616,5.582 6.613,5.564 6.602,5.548 6.602,5.548 6.508,5.454 6.431,5.403 6.34,5.385 6.34,5.385 6.2,5.413 6.08,5.492 6.08,5.492 5.933,5.639 5.86,5.749 5.834,5.878 5.834,5.878 5.834,5.919 5.847,5.984 5.884,6.04 5.884,6.04 6.02,6.175 6.046,6.193 6.078,6.199 6.078,6.199 6.095,6.199 6.144,6.248 6.144,6.255 5.601,6.798 5.561,6.857 5.547,6.928 5.547,6.928 5.5,6.928 5.417,6.911 5.347,6.864 5.347,6.864 4.81,6.328 4.791,6.347 4.791,6.363 4.734,6.42 4.734,6.448 4.689,6.493 4.689,6.509 4.637,6.561 4.547,6.621 4.442,6.642 4.442,6.642 4.301,6.614 4.182,6.534 4.182,6.534 4.044,6.396 3.962,6.275 3.934,6.131 3.934,6.131 3.951,6.046 3.999,5.974 3.999,5.974 4.086,5.886 4.104,5.883 4.119,5.873 4.119,5.873 4.169,5.823 4.17,5.823 4.186,5.819 4.2,5.81 4.2,5.81 4.213,5.797 4.226,5.797 4.251,5.772 3.703,5.224 3.658,5.156 3.642,5.075 3.642,5.075 3.642,5.029 3.66,4.935 3.714,4.856 3.714,4.856 5.347,3.222 5.415,3.177 5.495,3.162 5.495,3.162 5.508,3.162 5.626,3.186 5.726,3.252 5.726,3.252 6.545,4.072 6.565,4.07 6.583,4.06 6.583,4.06 6.807,3.835 5.938,2.966
  PWR region: 1590 vertices and 1 holes, not listed, extent 0.017,2.533 9.768,11.518
  PWR region: 307 vertices and 0 holes, not listed, extent 7.356,6.631 7.541,7.596
  PWR region: 1100 vertices and 0 holes, not listed, extent 6.785,6.091 8.118,7.291
RESC0603(1608)_N [mm] "Chip Resistor, Body 1.6x0.8mm, IPC Medium Density"
  rect 0.9x1 smd: 1(-0.8,0) 2(0.8,0)
  silkscreen extent -0.05,-0.4 0.05,0.4, body extent -0.85,-0.47 0.85,0.47, height 0.6
TSOP65P490X110-8N [mm] "TSOP, 8-Leads, Body 3,00x3,00mm, Pitch 0,65mm, IPC Medium Density"
  rect 1.35x0.5 smd mask+0.025: 1(-2.275,0.975) 2(-2.275,0.325) 3(-2.275,-0.325) 4(-2.275,-0.975) 5(2.275,-0.975) 6(2.275,-0.325) 7(2.275,0.325) 8(2.275,0.975)
  silkscreen extent -2.4,-1.6 1.2,1.9, body extent -2.45,-1.6 2.45,1.6, height 1.1

## Part data
A1: library part CMP-00038-1
ADP1715: "IC REG LINEAR 1.8V 500MA 8MSOP / Mfr No: ADP1715ARMZ-1.8-R7 / Supplier No: ADP1715ARMZ-1.8-R7CT-ND"
C1 C2 C3 C4 C5 C6 C7 C8 C9 C10 C11 C12 C16 C17 C18 C19 C20 C21 C22 C23 C24 C25 C26 C27: library part CMP-1035-02588-1, "CAP 100nF 25V ±10% 0603 (1608 Metric) Thickness 1mm SMD", Case-EIA=0603, Case-Metric=1608, Rated Voltage="25 V", Tolerance=Â±10%, Max Thickness="1 mm", Technology=SMT
C13 C14 C15: "Capacitor (Semiconductor SIM Model)", LatestRevisionDate=29-May-2009, LatestRevisionNote="IPC-7351 Footprint Added.", PackageDescription="Chip Capacitor", PackageReference=C1206, Published=8-Jun-2000, Publisher="Altium Limited"
J7: library part CMP-00488-1, "Conn Array Terminal FMC Male SKT 160 POS 1.27mm Solder ST SMD", Manufacturer=Samtec, Supplier Part Number=SAM8732-ND, ComponentLink1Description=asp-134604-01-9532665.pdf, ComponentLink1URL=https://datasheet.ciiva.com/9532/asp-134604-01-9532665.pdf, ComponentLink2Description=asp-134604-01-403751.pdf, ComponentLink2URL=https://datasheet.ciiva.com/403/asp-134604-01-403751.pdf, Length=55.78mm, Manufacturer Part Number=ASP-134604-01, Number of arrays=4, Number of poles=160, Pitch=1.27mm, Product Type=SKT, Supplier=Digikey, Width=14.68mm, Wire connection method=Solder
LOGO1: library part CMP-00145-1, "4 Layers: only valid for layer stack as defined for the TestBoards"
M1 M2: library part CMP-00023-1, "Mounting Hole, 7.2mm pad, 3.2mm plated hole", ClassName="Mounting Hole"
R1: library part CMP-1012-00098-1, "15K 0.1W 5% 0603 (1608 Metric)  SMD", Case-EIA=0603, Case-Metric=1608, Power="0.1 W", Tolerance="5 %", Technology=SMT
R2: library part CMP-1012-00098-1, "12K 0.1W 5% 0603 (1608 Metric)  SMD", Case-EIA=0603, Case-Metric=1608, Power="0.1 W", Tolerance="5 %", Technology=SMT
U1 U2 U3 U4 U5 U6 U7 U8: library part S80KS5122, "Cypress 64Mbit DRAM 24FBGA HyperRam", ComponentLink1Description="New link", ComponentLink1URL=https://www.mouser.it/ProductDetail/Infineon-Technologies/S80KS5122GABHV020?qs=doiCPypUmgEJDMhxR%2Fbnog%3D%3D

## Via types
v1: diameter 0.6, hole 0.3, Top Layer to Bottom Layer, tented both sides, 210 vias
v2: diameter 0.4, hole 0.2, Top Layer to Bottom Layer, tented both sides, 73 vias

## Nets (pads, with @x,y where several pads share a name; then routed paths per layer and width w, separated by ;. In a path a pad name is that pad's centre, name@x,y a point inside that pad or via, vN(x,y) a via of type N, cw(c..) or ccw(c..) an arc to the next point about the centre after c; other vN are vias at no path point)
FMC_HYPER2_CK_N: J7.C23 U1.B1 U2.B1 U3.B1 U4.B1 | length 102.1
  Top Layer w0.15: U2.B1@12.991,38.541 13.639,39.189 v1(13.782,39.189) ; U4.B1@12.995,16.755 13.033,16.794 13.387,16.794 13.503,16.909 14.481,16.909 15.084,16.306 15.084,15.94 15.35,15.674 17.775,15.674 17.992,15.892 17.992,17.006 17.755,17.244 v1(17.755,17.319) ; U3.B1@12.995,25.391 14.148,25.391 14.87,26.113 16.518,26.113 17.092,25.539 17.092,22.413 15.701,21.022 15.701,19.863 15.967,19.596 17.587,19.596 17.995,20.004 17.995,21.131 17.755,21.371 v1(17.755,21.459) 17.755,21.532 17.995,21.772 17.995,29.63 18.859,30.495 22.561,30.495 22.76,30.693 v1(22.874,30.693) ; U1.B1@13.005,47.489 14.662,47.489 14.8,47.628 14.8,48.117 15.225,48.542 15.804,48.542 16.229,48.117 16.229,46.576 16.367,46.437 16.54,46.437 16.679,46.576 16.679,47.064 17.104,47.489 17.634,47.489 18.37,46.754 18.37,43.656 v1(18.749,43.277) 18.366,42.893 18.366,41.986 14.782,38.403 v1(14.782,38.189)
  Bottom Layer w0.15: v1(13.782,39.189) v1(14.782,38.189) ; v1(17.755,17.319) 17.98,17.544 17.98,21.146 17.755,21.371 v1(17.755,21.459) ; v1(18.749,43.277) 18.369,42.896 18.369,42.583 18.37,32.648 20.523,30.494 22.29,30.494 22.561,30.495 22.76,30.693 v1(22.874,30.693) 22.962,30.693 23.187,30.469 23.966,30.469 24.447,30.949 25.072,31.574 cw(c25.613,31.034) 26.07,31.646 26.082,31.646 26.473,31.254 ccw(c26.668,31.449) 26.862,31.254 ccw(c26.668,31.449) 26.862,31.643 25.487,33.018 cw(c26.028,33.559) 25.487,34.099 cw(c26.028,33.559) 26.568,34.099 27.943,32.724 ccw(c28.138,32.919) 28.332,33.113 27.334,34.111 cw(c27.875,34.652) 27.262,35.11 27.262,35.121 27.362,35.221 27.366,35.222 cw(c27.875,34.652) 28.415,35.193 29.414,34.194 ccw(c29.608,34.389) 29.802,34.194 ccw(c29.608,34.389) 29.802,34.584 ; 29.801,34.584 29.482,34.903 cw(c30.023,35.444) 29.482,35.985 29.708,36.211 30.697,37.2 31.99,37.2 J7.C23@32.38,37.59
FMC_HYPER2_CK_P: J7.C22 U1.B2 U2.B2 U3.B2 U4.B2 | length 105.9
  Top Layer w0.15: U4.B2@12.995,15.755 13.041,15.755 13.705,16.42 14.279,16.42 14.595,16.104 14.595,15.738 15.148,15.185 17.978,15.185 18.482,15.689 18.482,17.006 18.72,17.244 v1(18.72,17.319) ; U3.B2@12.995,24.417 13.479,24.901 14.35,24.901 15.073,25.624 16.315,25.624 16.603,25.336 16.603,22.616 15.211,21.225 15.211,19.66 15.764,19.107 17.79,19.107 18.484,19.801 18.484,21.146 18.694,21.356 v1(18.694,21.459) 18.694,21.562 18.484,21.772 18.484,29.427 19.062,30.005 22.539,30.005 22.79,29.755 v1(22.878,29.755) ; U2.B2@12.995,37.602 13.012,37.619 13.244,37.619 14.652,39.027 14.705,39.08 ccw(c14.546,39.24) 14.705,39.399 14.486,39.618 cw(c14.645,39.777) 14.486,39.936 cw(c14.645,39.777) 14.804,39.936 15.055,39.685 ccw(c15.214,39.844) 15.373,39.685 ccw(c15.214,39.844) 15.373,40.004 15.122,40.254 cw(c15.282,40.413) 15.122,40.573 cw(c15.282,40.413) 15.441,40.573 15.692,40.322 ccw(c15.851,40.481) 16.01,40.322 ccw(c15.851,40.481) 16.01,40.64 15.759,40.891 cw(c15.918,41.05) 15.759,41.209 cw(c15.918,41.05) 16.077,41.209 16.296,40.99 ccw(c16.456,41.149) 16.615,40.99 16.841,41.216 17.877,42.252 17.877,42.899 v1(17.499,43.277) 17.88,43.658 17.88,46.551 17.431,47 17.307,47 17.168,46.862 17.168,46.373 16.743,45.948 16.165,45.948 15.739,46.373 15.739,47.914 15.601,48.052 15.428,48.052 15.289,47.914 15.289,47.425 14.864,47 13.495,47 U1.B2@12.995,46.5
  Bottom Layer w0.15: v1(17.499,43.277) 17.879,42.896 17.879,42.38 ; 17.88,42.38 17.88,32.446 20.321,30.005 22.539,30.005 22.79,29.755 v1(22.878,29.755) 22.966,29.755 23.191,29.979 24.169,29.979 24.793,30.603 25.418,31.228 cw(c25.613,31.034) 25.808,31.228 26.127,30.908 ccw(c26.668,31.449) 27.208,30.908 ccw(c26.668,31.449) 27.208,31.989 25.833,33.364 cw(c26.028,33.559) 25.833,33.753 cw(c26.028,33.559) 26.222,33.753 27.597,32.378 ccw(c28.138,32.919) 28.678,32.378 ccw(c28.138,32.919) 28.678,33.459 27.68,34.458 cw(c27.875,34.652) 28.069,34.846 ; v1(18.694,21.459) 18.694,21.371 18.469,21.146 18.469,17.569 v1(18.72,17.319) ; 28.069,34.846 29.066,33.849 ccw(c29.608,34.389) 30.065,33.777 30.077,33.777 30.22,33.92 30.22,33.931 ccw(c29.608,34.389) 30.22,34.847 30.22,34.858 29.828,35.25 cw(c30.023,35.444) 29.828,35.638 30.054,35.865 30.9,36.71 31.99,36.71 J7.C22@32.38,36.32
FMC_HYPER2_CSN0: J7.D24 U2.A3 | length 52.7
  Top Layer w0.15: U2.A3@13.995,36.602 20.191,36.602 v1(20.789,37.2)
  Bottom Layer w0.15: v1(20.789,37.2) 21.85,38.26 23.117,39.527 23.548,39.527 23.623,39.527 ccw(c23.623,39.802) 23.898,39.802 23.898,40.814 cw(c24.173,40.814) 24.173,41.089 cw(c24.173,40.814) 24.448,40.814 24.448,38.24 ccw(c24.723,38.24) 24.723,37.965 ccw(c24.723,38.24) 24.998,38.24 24.998,40.814 cw(c25.273,40.814) 25.273,41.089 cw(c25.273,40.814) 25.548,40.814 25.548,38.24 ccw(c25.823,38.24) 25.823,37.965 ccw(c25.823,38.24) 26.098,38.24 26.098,40.814 cw(c26.373,40.814) 26.373,41.089 cw(c26.373,40.814) 26.648,40.814 26.648,38.24 ccw(c26.923,38.24) 26.923,37.965 ccw(c26.923,38.24) 27.198,38.24 27.198,40.814 cw(c27.473,40.814) 27.473,41.089 cw(c27.473,40.814) 27.748,40.814 27.748,38.24 ccw(c28.023,38.24) 28.023,37.965 ccw(c28.023,38.24) 28.298,38.24 28.298,40.814 cw(c28.573,40.814) 28.573,41.089 cw(c28.573,40.814) 28.848,40.814 28.848,38.24 ccw(c29.123,38.24) 29.123,37.965 ccw(c29.123,38.24) 29.398,38.24 29.398,40.814 cw(c29.673,40.814) 29.673,41.089 cw(c29.673,40.814) 29.948,40.814 29.948,39.802 ccw(c30.223,39.802) 30.223,39.527 30.648,39.527 32.983,39.527 J7.D24@33.65,38.86
FMC_HYPER2_CSN1: J7.D21 U3.A3 | length 49.7
  Top Layer w0.15: U3.A3@13.995,23.417 14.013,23.399 15.745,23.399 v1(15.763,23.381) ; v1(19.582,24.558) 21.179,24.558 21.366,24.744 21.366,25.331 21.366,25.406 ccw(c21.164,25.406) 21.164,25.608 19.736,25.608 cw(c19.736,25.81) 19.534,25.81 cw(c19.736,25.81) 19.736,26.012 22.996,26.012 ccw(c22.996,26.214) 23.198,26.214 ccw(c22.996,26.214) 22.996,26.416 19.736,26.416 cw(c19.736,26.618) 19.534,26.618 cw(c19.736,26.618) 19.736,26.82 22.996,26.82 ccw(c22.996,27.022) 23.198,27.022 ccw(c22.996,27.022) 22.996,27.224 19.736,27.224 cw(c19.736,27.426) 19.534,27.426 cw(c19.736,27.426) 19.736,27.628 21.164,27.628 ccw(c21.164,27.83) 21.366,27.83 21.366,28.285 v1(21.366,28.771)
  Bottom Layer w0.15: v1(15.763,23.381) 15.799,23.417 16.558,23.417 16.633,23.417 ccw(c16.633,23.578) 16.794,23.578 16.794,24.067 cw(c16.956,24.067) 16.956,24.229 17.037,24.229 cw(c17.037,24.067) 17.198,24.067 17.198,22.997 ccw(c17.36,22.997) 17.36,22.835 17.441,22.835 ccw(c17.441,22.997) 17.602,22.997 17.602,24.067 cw(c17.764,24.067) 17.764,24.229 17.845,24.229 cw(c17.845,24.067) 18.006,24.067 18.006,22.997 ccw(c18.168,22.997) 18.168,22.835 18.249,22.835 ccw(c18.249,22.997) 18.41,22.997 18.41,23.255 cw(c18.572,23.255) 18.572,23.417 19.016,23.417 19.212,23.417 19.582,23.787 v1(19.582,24.558) ; v1(21.366,28.771) 21.459,28.771 21.679,28.551 25.846,28.551 31.75,34.455 33.055,34.455 J7.D21@33.65,35.05
FMC_HYPER2_CSN2: J7.D18 U4.A3 | length 52.7
  Top Layer w0.15: U4.A3@13.995,14.755 14.015,14.735 16.285,14.735 17.218,13.801 18.492,13.801 v1(19.42,14.73)
  Bottom Layer w0.15: v1(19.42,14.73) 20.028,15.338 20.53,15.338 20.605,15.338 ccw(c20.605,15.54) 20.807,15.54 20.807,16.218 cw(c21.009,16.218) 21.009,16.42 cw(c21.009,16.218) 21.211,16.218 21.211,14.458 ccw(c21.413,14.458) 21.413,14.256 ccw(c21.413,14.458) 21.615,14.458 21.615,16.218 cw(c21.817,16.218) 21.817,16.42 cw(c21.817,16.218) 22.019,16.218 22.019,14.458 ccw(c22.221,14.458) 22.221,14.256 ccw(c22.221,14.458) 22.423,14.458 22.423,16.218 cw(c22.625,16.218) 22.625,16.42 cw(c22.625,16.218) 22.827,16.218 22.827,14.458 ccw(c23.029,14.458) 23.029,14.256 ccw(c23.029,14.458) 23.231,14.458 23.231,16.218 cw(c23.433,16.218) 23.433,16.42 cw(c23.433,16.218) 23.635,16.218 23.635,15.54 ccw(c23.837,15.54) 23.837,15.338 24.119,15.338 34.051,15.338 35.298,16.584 35.298,30.836 34.893,31.24 J7.D18@33.65,31.24
FMC_HYPER2_CSN3: J7.D27 U1.A3 | length 52.7
  Top Layer w0.15: U1.A3@14.033,45.538 14.416,45.155 15.03,45.155 15.375,45.5 v1(15.428,45.5)
  Bottom Layer w0.15: v1(15.428,45.5) 15.428,45.619 17.234,47.425 20.401,47.425 20.476,47.425 ccw(c20.476,47.65) 20.701,47.65 20.701,48.372 cw(c20.926,48.372) 20.926,48.597 cw(c20.926,48.372) 21.151,48.372 21.151,46.478 ccw(c21.376,46.478) 21.376,46.253 ccw(c21.376,46.478) 21.601,46.478 21.601,48.372 cw(c21.826,48.372) 21.826,48.597 cw(c21.826,48.372) 22.051,48.372 22.051,46.478 ccw(c22.276,46.478) 22.276,46.253 ccw(c22.276,46.478) 22.501,46.478 22.501,48.372 cw(c22.726,48.372) 22.726,48.597 cw(c22.726,48.372) 22.951,48.372 22.951,46.478 ccw(c23.176,46.478) 23.176,46.253 ccw(c23.176,46.478) 23.401,46.478 23.401,48.372 cw(c23.626,48.372) 23.626,48.597 cw(c23.626,48.372) 23.851,48.372 23.851,46.478 ccw(c24.076,46.478) 24.076,46.253 ccw(c24.076,46.478) 24.301,46.478 24.301,48.372 cw(c24.526,48.372) 24.526,48.597 cw(c24.526,48.372) 24.751,48.372 24.751,46.478 ccw(c24.976,46.478) 24.976,46.253 ccw(c24.976,46.478) 25.201,46.478 25.201,48.372 cw(c25.426,48.372) 25.426,48.597 cw(c25.426,48.372) 25.651,48.372 25.651,46.478 ccw(c25.876,46.478) 25.876,46.253 ccw(c25.876,46.478) 26.101,46.478 26.101,48.372 cw(c26.326,48.372) 26.326,48.597 cw(c26.326,48.372) 26.551,48.372 26.551,46.478 ccw(c26.776,46.478) 26.776,46.253 ccw(c26.776,46.478) 27.001,46.478 27.001,47.2 cw(c27.226,47.2) 27.226,47.425 27.713,47.425 31.835,43.303 33.017,43.303 J7.D27@33.65,42.67
FMC_HYPER2_D0: J7.D11 U1.D3 U2.D3 U3.D3 U4.D3 | length 120.7
  Top Layer w0.15: v1(9.079,21.219) 9.079,22.435 9.593,22.949 10.527,22.949 U3.D3@10.995,23.417 ; v1(9.083,14.017) 9.205,14.017 9.475,14.287 10.527,14.287 U4.D3@10.995,14.755 ; U2.D3@10.995,36.602 10.468,37.129 10.468,40.488 11.074,41.094 v1@13.5,41.094 ; U1.D3@10.995,45.5 11.033,45.462 11.186,45.462 11.501,45.146 11.501,43.307 11.501,43.092 11.861,42.732 cw(c11.733,42.604) 11.861,42.475 11.82,42.434 ccw(c11.949,42.305) 11.82,42.177 11.849,42.148 ccw(c11.977,42.277) 12.106,42.148 12.401,42.443 cw(c12.53,42.315) 12.658,42.443 12.687,42.415 cw(c12.558,42.286) 12.687,42.158 12.392,41.862 ccw(c12.52,41.734) 12.392,41.605 12.42,41.577 ccw(c12.549,41.705) 12.677,41.577 12.719,41.618 cw(c12.847,41.49) 12.976,41.618 13.181,41.413 v1@13.5,41.094 ; v1(13.526,41.067) v1@13.5,41.094 ; v1(16.739,37.994) 21.467,37.994 22.997,36.465 23.05,36.412 ccw(c23.193,36.555) 23.336,36.412 23.645,36.722 cw(c23.788,36.579) 23.931,36.722 cw(c23.788,36.579) 23.931,36.436 23.026,35.531 ccw(c23.169,35.388) 23.026,35.245 ccw(c23.169,35.388) 23.311,35.245 24.217,36.15 cw(c24.359,36.007) 24.502,36.15 cw(c24.359,36.007) 24.502,35.865 23.597,34.959 ccw(c23.74,34.817) 23.597,34.674 ccw(c23.74,34.817) 23.883,34.674 24.788,35.579 cw(c24.931,35.436) 25.074,35.579 cw(c24.931,35.436) 25.074,35.293 24.168,34.388 ccw(c24.311,34.245) 24.168,34.102 ccw(c24.311,34.245) 24.454,34.102 24.764,34.412 cw(c24.907,34.269) 25.05,34.412 25.298,34.163 27.142,32.32 27.142,23.289 v1(27.175,23.255)
  Bottom Layer w0.15: v1(9.079,21.219) 9.109,21.189 9.109,19.539 10.315,18.332 10.368,18.279 ccw(c10.493,18.404) 10.618,18.279 10.629,18.29 cw(c10.754,18.166) 10.878,18.29 10.985,18.183 cw(c10.86,18.059) 10.985,17.934 10.723,17.672 ccw(c10.847,17.547) 10.723,17.422 10.83,17.315 ccw(c10.954,17.44) 11.079,17.315 11.081,17.317 cw(c11.206,17.192) 11.33,17.317 11.69,16.957 12.707,15.94 ; v1(9.083,14.017) 9.109,13.991 10.758,13.991 10.858,14.092 10.911,14.145 ccw(c10.805,14.251) 10.911,14.357 10.523,14.746 cw(c10.623,14.846) 10.523,14.946 10.608,15.031 cw(c10.708,14.931) 10.808,15.031 11.799,14.041 ccw(c11.899,14.141) 11.999,14.041 12.085,14.126 ccw(c11.985,14.226) 12.085,14.326 11.094,15.317 cw(c11.194,15.417) 11.094,15.517 11.18,15.603 cw(c11.28,15.503) 11.38,15.603 11.768,15.214 ccw(c11.874,15.32) 11.981,15.214 12.362,15.595 12.707,15.94 ; v1@13.5,41.094 v1(13.526,41.067) 13.596,41.067 16.669,37.994 v1(16.739,37.994) ; v1(27.175,23.255) 27.297,23.255 27.607,22.945 33.055,22.945 J7.D11@33.65,22.35 34.382,21.618 34.382,20.896 33.902,20.417 31.62,20.417 31.241,20.037 24.801,20.037 24.517,20.037 cw(c24.517,20.199) 24.356,20.199 24.356,20.747 ccw(c24.194,20.747) 24.194,20.909 24.113,20.909 ccw(c24.113,20.747) 23.952,20.747 23.952,19.327 cw(c23.79,19.327) 23.79,19.165 23.709,19.165 cw(c23.709,19.327) 23.548,19.327 23.548,20.747 ccw(c23.386,20.747) 23.386,20.909 23.305,20.909 ccw(c23.305,20.747) 23.144,20.747 23.144,19.327 cw(c22.982,19.327) 22.982,19.165 22.901,19.165 cw(c22.901,19.327) 22.74,19.327 22.74,20.747 ccw(c22.578,20.747) 22.578,20.909 22.497,20.909 ccw(c22.497,20.747) 22.336,20.747 22.336,19.327 cw(c22.174,19.327) 22.174,19.165 22.093,19.165 cw(c22.093,19.327) 21.932,19.327 21.932,20.747 ccw(c21.77,20.747) 21.77,20.909 21.689,20.909 ccw(c21.689,20.747) 21.528,20.747 21.528,19.327 cw(c21.366,19.327) 21.366,19.165 21.285,19.165 cw(c21.285,19.327) 21.124,19.327 21.124,20.747 ccw(c20.962,20.747) 20.962,20.909 20.881,20.909 ccw(c20.881,20.747) 20.72,20.747 20.72,20.199 cw(c20.558,20.199) 20.558,20.037 20.483,20.037 19.582,19.136 19.582,16.536 18.986,15.94 12.707,15.94
FMC_HYPER2_D1: J7.D12 U1.D2 U2.D2 U3.D2 U4.D2 | length 125.2
  Top Layer w0.15: v1(10.794,19.252) 10.794,17.799 10.464,17.469 10.464,16.286 U4.D2@10.995,15.755 ; U3.D2@10.995,24.417 11.495,24.917 11.495,26.108 ; U2.D2@10.995,37.602 11.46,38.067 12.261,38.067 12.539,38.345 12.539,39.216 13.52,40.198 13.98,40.198 16.281,42.499 16.281,42.72 v1(16.367,42.806) ; U1.D2@10.995,46.5 11.495,47 11.495,48.564 11.493,48.565 11.493,49.837 12.116,50.46 15.402,50.46 19.519,46.343 19.519,39.707 19.265,39.453 v1(19.265,39.331) ; 11.494,26.108 11.494,29.332 11.547,29.385 ccw(c11.388,29.544) 11.547,29.703 11.433,29.817 cw(c11.592,29.976) 11.433,30.135 cw(c11.592,29.976) 11.752,30.135 12.298,29.589 ccw(c12.457,29.748) 12.616,29.589 ccw(c12.457,29.748) 12.616,29.907 12.07,30.453 cw(c12.229,30.612) 12.07,30.771 cw(c12.229,30.612) 12.388,30.771 12.934,30.225 ccw(c13.093,30.384) 13.252,30.225 ccw(c13.093,30.384) 13.252,30.543 12.706,31.089 cw(c12.865,31.249) 12.706,31.408 cw(c12.865,31.249) 13.024,31.408 13.57,30.862 ccw(c13.729,31.021) 13.889,30.862 ccw(c13.729,31.021) 13.889,31.18 13.343,31.726 cw(c13.502,31.885) 13.343,32.044 cw(c13.502,31.885) 13.661,32.044 14.207,31.498 ccw(c14.366,31.657) 14.525,31.498 ccw(c14.366,31.657) 14.525,31.816 ; v1(14.222,27.149) 14.222,28.877 16.621,31.275 v1(20.966,31.275) ; 14.525,31.816 13.979,32.362 cw(c14.138,32.521) 13.979,32.68 cw(c14.138,32.521) 14.297,32.68 14.411,32.567 ccw(c14.57,32.726) 14.729,32.567 15.032,32.869 15.148,32.869 16.201,32.869 16.276,32.869 ccw(c16.276,33.031) 16.437,33.031 16.437,33.31 cw(c16.599,33.31) 16.599,33.471 16.68,33.471 cw(c16.68,33.31) 16.841,33.31 16.841,32.598 ccw(c17.003,32.598) 17.003,32.437 17.084,32.437 ccw(c17.084,32.598) 17.245,32.598 17.245,33.31 cw(c17.407,33.31) 17.407,33.471 17.488,33.471 cw(c17.488,33.31) 17.649,33.31 17.649,32.598 ccw(c17.811,32.598) 17.811,32.437 17.892,32.437 ccw(c17.892,32.598) 18.053,32.598 18.053,33.31 cw(c18.215,33.31) 18.215,33.471 18.296,33.471 cw(c18.296,33.31) 18.457,33.31 18.457,32.598 ccw(c18.619,32.598) 18.619,32.437 18.7,32.437 ccw(c18.7,32.598) 18.861,32.598 18.861,33.31 cw(c19.023,33.31) 19.023,33.471 19.104,33.471 cw(c19.104,33.31) 19.265,33.31 19.265,33.031 ccw(c19.427,33.031) 19.427,32.869 19.724,32.869 20.401,32.869 v1(20.423,32.847) 25.759,32.847 26.312,32.294 v1(26.312,24.541)
  Bottom Layer w0.15: v1(10.794,19.252) 11.845,20.303 11.845,23.299 14.222,25.676 v1(14.222,27.149) ; v1(16.367,42.806) 16.367,43.718 17.035,44.385 19.083,44.385 19.582,43.887 19.582,42.993 19.582,42.514 cw(c19.42,42.514) 19.42,42.353 19.141,42.353 ccw(c19.141,42.191) 18.98,42.191 18.98,42.11 ccw(c19.141,42.11) 19.141,41.949 19.519,41.949 cw(c19.519,41.787) 19.68,41.787 19.68,41.706 cw(c19.519,41.706) 19.519,41.545 19.141,41.545 ccw(c19.141,41.383) 18.98,41.383 18.98,41.302 ccw(c19.141,41.302) 19.141,41.141 19.519,41.141 cw(c19.519,40.979) 19.68,40.979 19.68,40.898 cw(c19.519,40.898) 19.519,40.737 19.141,40.737 ccw(c19.141,40.575) 18.98,40.575 18.98,40.494 ccw(c19.141,40.494) 19.141,40.333 19.42,40.333 cw(c19.42,40.171) 19.582,40.171 19.582,39.83 19.582,39.757 19.265,39.441 v1(19.265,39.331) 19.212,39.278 19.212,37.643 19.566,37.289 19.566,33.705 v1(20.423,32.847) 20.946,32.324 20.966,32.324 v1(20.966,31.275) ; v1(26.312,24.541) 26.403,24.541 26.729,24.215 33.055,24.215 J7.D12@33.65,23.62